# EAGLE board Quad_Cape (EAGLE 9.2.2)
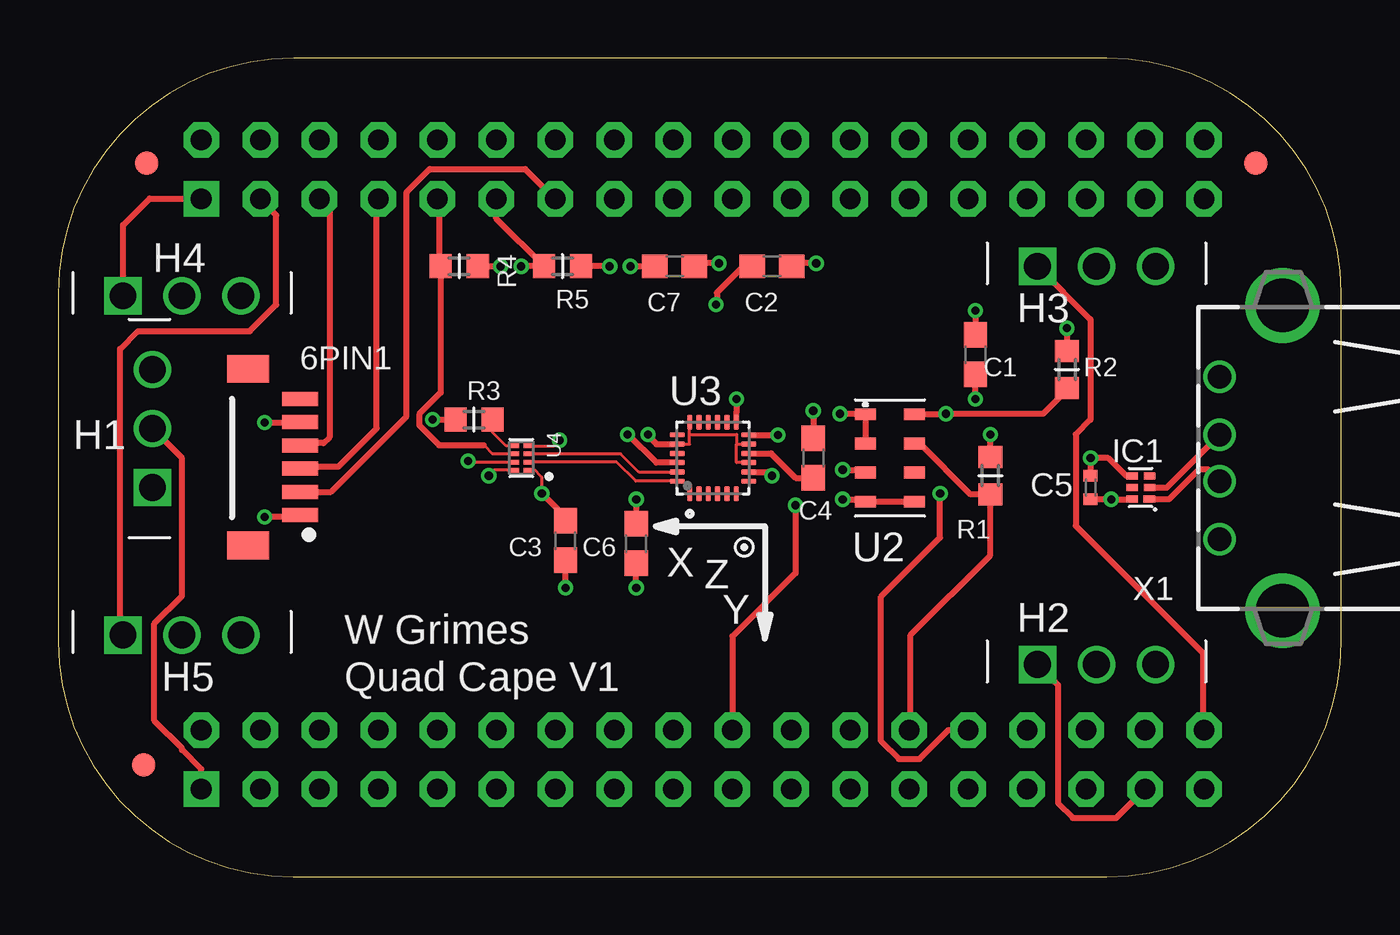
[diagram p0: board, top side]
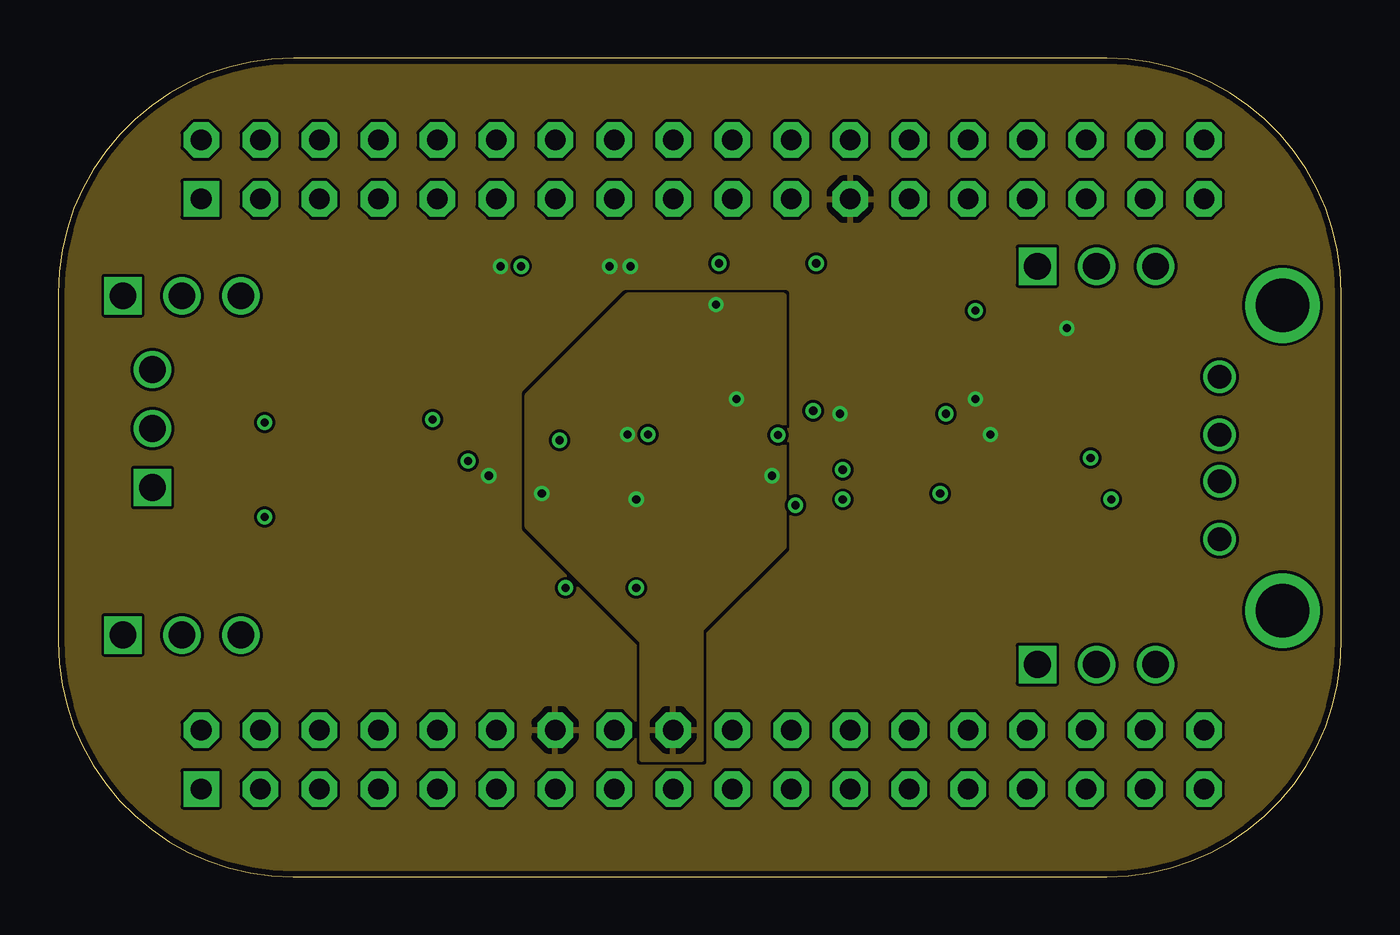
[diagram p1: board, inner layer Route2]
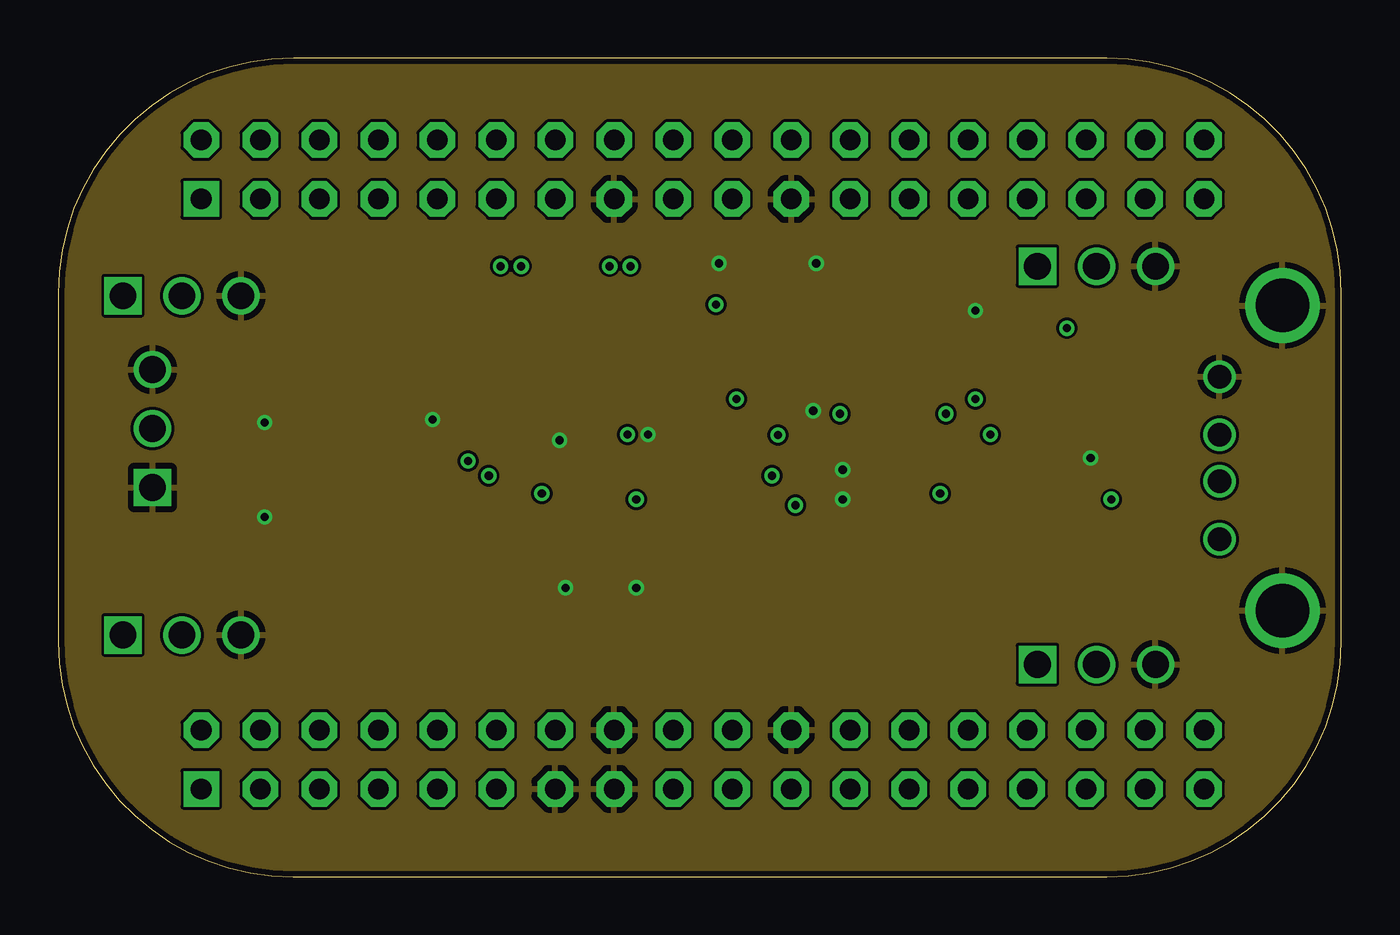
[diagram p2: board, inner layer Route15]
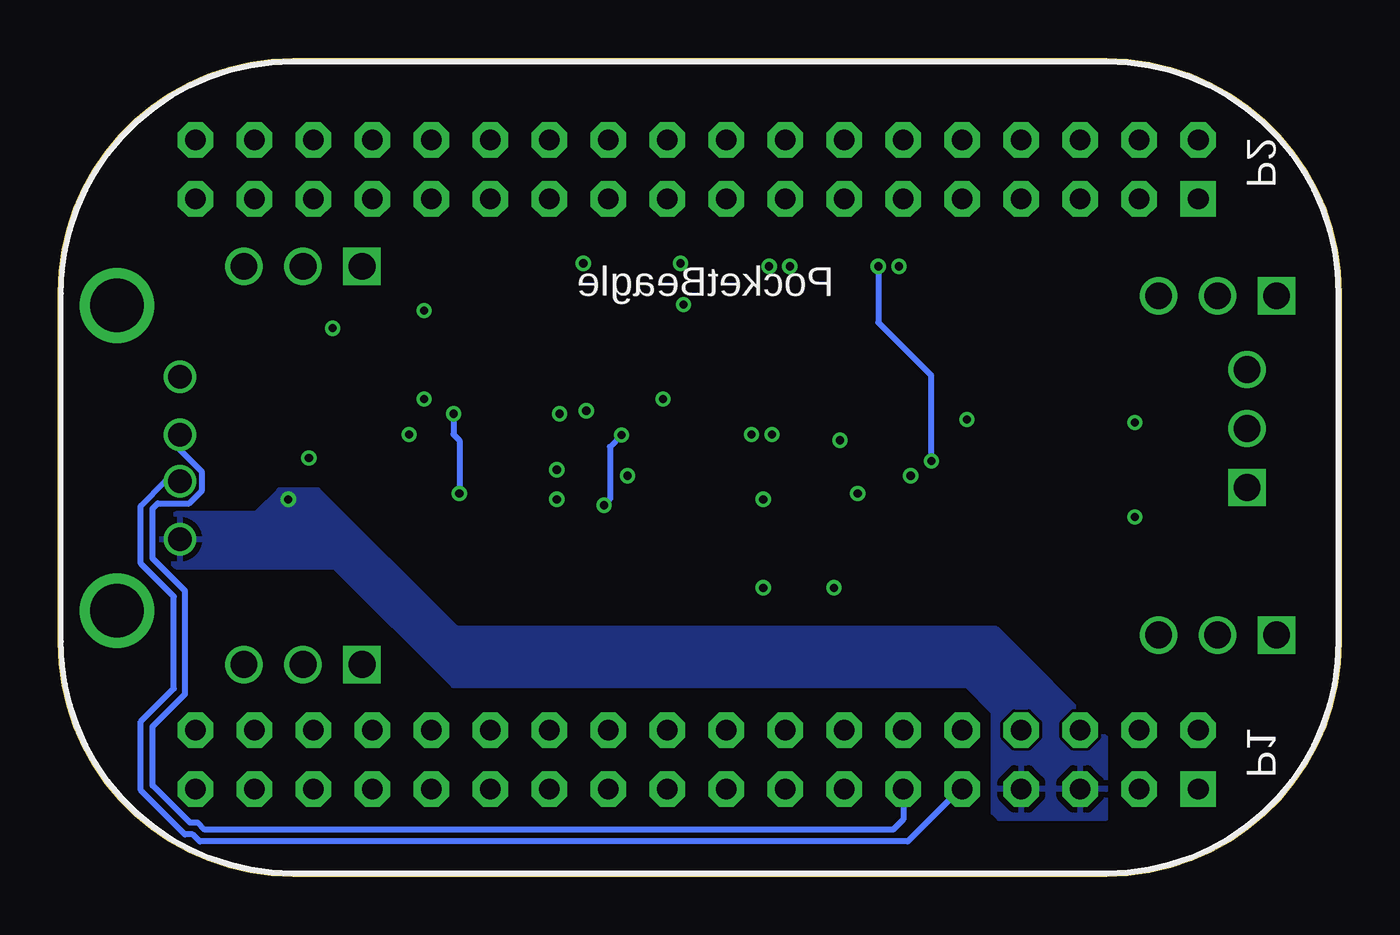
[diagram p3: board, bottom side, seen from below]

Size 55.25 x 35.26 mm. Coordinates in mm from the lower left corner, seen from the top.
Outline: 0,25.12 0,10.12 arc90 10.12,0 45.15,0 arc90 55.25,10.1 55.25,25.15 arc90 45.14,35.25 10.13,35.25 arc90 0,25.12
Copper layers (1*2*15*16): Top 0.035mm / dielectric 0.23mm / Route2 0.035mm / dielectric 0.93mm / Route15 0.035mm / dielectric 0.23mm / Bottom 0.035mm
Design rules "ENGI301_4lyr *": minimum track width 5mil, minimum drill 12mil, track to track 5mil, track to pad 5mil, pad to pad 5mil, via to via 5mil, smd to smd 5mil, copper to edge 10mil, drill to drill 12mil, minimum pad ring 6mil, minimum via ring 6mil, stop-mask expansion 3mil, vias tented up to drill 25mil, thermal gap 10mil

## Footprints (pad centres in the part's own frame; a part is rotated, then mirrored left to right if it is on the bottom)
STRAWSON_EAGLE_LIB_JST_SH_6 = smd 0.6 x 1.55: 1 5,0; 2 4,0; 3 3,0; 4 2,0; 5 1,0; 6 0,0 | smd 1.2 x 1.8: P$1 -1.3,-2.225; P$2 6.3,-2.225
C0603 = smd 1.1 x 1: 1 -0.85,0; 2 0.85,0
0402 = smd 0.5 x 0.6: 1 -0.5,0; 2 0.5,0
FIDUCIAL_40MIL = smd 1.016 x 1.016: P$1 0,0
3PIN_100MIL = drill 1.15 square: 1 -2.54,0 | drill 1.15: 2 0,0; 3 2.54,0
SON-6(TI)-DRY = smd 0.3 x 0.52: 1 -0.5,-0.38 | smd 0.3 x 0.49: 2 0,-0.375; 3 0.5,-0.375; 4 0.5,0.375; 5 0,0.375; 6 -0.5,0.375
R0603 = smd 0.95 x 1.031: 1 -0.8,0; 2 0.8,0
POCKETBEAGLE = drill 0.889 pad 1.524 square: 1 5.91,3.53; 37 5.91,28.93 | drill 0.889 pad 1.524 octagon: 2 5.91,6.07; 3 8.45,3.53; 4 8.45,6.07; 5 10.99,3.53; 6 10.99,6.07; 7 13.53,3.53; 8 13.53,6.07; 9 16.07,3.53; 10 16.07,6.07; 11 18.61,3.53; 12 18.61,6.07; 13 21.15,3.53; 14 21.15,6.07; 15 23.69,3.53; 16 23.69,6.07; 17 26.23,3.53; 18 26.23,6.07; 19 28.77,3.53; 20 28.77,6.07; 21 31.31,3.53; 22 31.31,6.07; 23 33.85,3.53; 24 33.85,6.07; 25 36.39,3.53; 26 36.39,6.07; 27 38.93,3.53; 28 38.93,6.07; 29 41.47,3.53; 30 41.47,6.07; 31 44.01,3.53; 32 44.01,6.07; 33 46.55,3.53; 34 46.55,6.07; 35 49.09,3.53; 36 49.09,6.07; 38 5.91,31.47; 39 8.45,28.93; 40 8.45,31.47; 41 10.99,28.93; 42 10.99,31.47; 43 13.53,28.93; 44 13.53,31.47; 45 16.07,28.93; 46 16.07,31.47; 47 18.61,28.93; 48 18.61,31.47; 49 21.15,28.93; 50 21.15,31.47; 51 23.69,28.93; 52 23.69,31.47; 53 26.23,28.93; 54 26.23,31.47; 55 28.77,28.93; 56 28.77,31.47; 57 31.31,28.93; 58 31.31,31.47; 59 33.85,28.93; 60 33.85,31.47; 61 36.39,28.93; 62 36.39,31.47; 63 38.93,28.93; 64 38.93,31.47; 65 41.47,28.93; 66 41.47,31.47; 67 44.01,28.93; 68 44.01,31.47; 69 46.55,28.93; 70 46.55,31.47; 71 49.09,28.93; 72 49.09,31.47
MS5611-01BA03 = smd 0.9 x 0.5: P1 -1.05,1.875; P2 -1.05,0.625; P3 -1.05,-0.625; P4 -1.05,-1.875; P5 1.05,-1.875; P6 1.05,-0.625; P7 1.05,0.625; P8 1.05,1.875
QFN40P300X300X105-25N = smd 0.64 x 0.22: 1 -1.545,1; 2 -1.545,0.6; 3 -1.545,0.2; 4 -1.545,-0.2; 5 -1.545,-0.6; 6 -1.545,-1; 13 1.545,-1; 14 1.545,-0.6; 15 1.545,-0.2; 16 1.545,0.2; 17 1.545,0.6; 18 1.545,1 | smd 0.22 x 0.64: 7 -1,-1.545; 8 -0.6,-1.545; 9 -0.2,-1.545; 10 0.2,-1.545; 11 0.6,-1.545; 12 1,-1.545; 19 1,1.545; 20 0.6,1.545; 21 0.2,1.545; 22 -0.2,1.545; 23 -0.6,1.545; 24 -1,1.545
VOLTAGETRANSLATOR_TXS0102DQER = smd 0.53 x 0.2: 1 -0.335,0.525; 2 -0.335,0.175; 3 -0.335,-0.175; 4 -0.335,-0.525; 5 0.335,-0.525; 6 0.335,-0.175; 7 0.335,0.175; 8 0.335,0.525
GHI2_USB_HOST_HORIZONTAL_W/CHASSIS_GND = drill 1: 1 -3.5,12.99; 2 -1,12.99; 3 1,12.99; 4 3.5,12.99 | drill 2.3: 5 -6.57,10.28; 6 6.57,10.28

## Placement (x,y rotation side)
6PIN1  STRAWSON_EAGLE_LIB_JST_SH_6  [STRAWSON_EAGLE_LIB_JST_SH_6]  10.41,20.57 270 top
C1  0.1uF  [C0603]  39.5,22.48 90 top
C2  0.1uF  [C0603]  30.73,26.29 180 top
C3  0.1uF  [C0603]  21.84,14.48 90 top
C4  0.1uF  [C0603]  32.51,18.03 270 top
C5  .1uF  [0402]  44.45,16.76 90 top
C6  0.1uF  [C0603]  24.89,14.35 90 top
C7  0.1uF  [C0603]  26.54,26.29 180 top
FUD1  FIDUCIAL  [FIDUCIAL_40MIL]  3.68,4.83 0 top
FUD2  FIDUCIAL  [FIDUCIAL_40MIL]  3.81,30.73 0 top
FUD3  FIDUCIAL  [FIDUCIAL_40MIL]  51.56,30.73 0 top
H1  3PIN_100MIL  [3PIN_100MIL]  4.06,19.3 90 top
H2  3PIN_100MIL  [3PIN_100MIL]  44.7,9.14 0 top
H3  3PIN_100MIL  [3PIN_100MIL]  44.7,26.29 0 top
H4  3PIN_100MIL  [3PIN_100MIL]  5.33,25.02 0 top
H5  3PIN_100MIL  [3PIN_100MIL]  5.33,10.41 0 top
IC1  TPD4S012DRY  [SON-6(TI)-DRY]  46.61,16.76 90 top
R1  10K  [R0603]  40.13,17.27 90 top
R2  10K  [R0603]  43.43,21.84 90 top
R3  10K  [R0603]  17.91,19.69 180 top
R4  10K  [R0603]  17.27,26.29 0 top
R5  10K  [R0603]  21.72,26.29 0 top
U1  POCKETBEAGLE  [POCKETBEAGLE]  0.25,0.25 0 top
U2  MS5611-01BA03  [MS5611-01BA03]  35.81,18.03 0 top
U3  ICM-20948  [QFN40P300X300X105-25N]  28.19,18.03 90 top
U4  TXS0102DQER  [VOLTAGETRANSLATOR_TXS0102DQER]  19.94,18.03 180 top
U$5  [XYZ_BIG]  30.43,15.09 180 top
X1  USB  [GHI2_USB_HOST_HORIZONTAL_W/CHASSIS_GND]  62.99,18.03 90 top

## Library data of the parts
6PIN1 C1-C4 C6 C7 FUD1-FUD3 H1-H5 R1-R5 U1 U2 X1 = Quad_Cape
C5 = GHI-BasicComponents
IC1 = GHI-IC
U3 = Quad_Cape; AVAILABILITY: Unavailable; DESCRIPTION: 9 Axis=3 Axis Gyro+3 Axis Accel+Compass. Pin For Pin With m; MF: TDK InvenSense; MP: ICM-20948; PACKAGE: QFN-24 InvenSense; PRICE: None
U4 = Quad_Cape; AVAILABILITY: Unavailable; DESCRIPTION: 2-Bit Bidirectional Voltage-Level Shifter for Open-Drain and Push-Pull Application 8-X2SON -40 to 85; MF: Texas Instruments; MP: TXS0102DQER; PACKAGE: XFDFN-8 Texas Instruments; PRICE: None
U$5 = Strawson_Eagle_Lib

## Nets
ALT_SCL: R2.1 U1.28 U2.P8
ALT_SDA: R1.1 U1.26 U2.P7
BAT.VIN: U1.50
GND: 6PIN1.1 6PIN1.5 C1.2 C2.1 C3.1 C4.1 C5.2 C6.1 C7.1 H1.1 H1.3 H2.3 H3.3 H4.3 H5.3 IC1.4 R3.2 U1.13 U1.15 U1.16 U1.22 U1.51 U1.57 U2.P3 U2.P4 U2.P5 U3.9 U3.11 U3.18 U3.20 U4.4 X1.4 X1.5 X1.6
GPS_RX: 6PIN1.4 U1.41
GPS_TX: 6PIN1.3 U1.43
IMU_INT: U1.20 U3.12
IMU_SCL: R4.1 U1.45 U4.6
IMU_SDA: R5.1 U1.47 U4.7
MOTOR1: H2.1 U1.33
MOTOR2: H3.1 U1.36
MOTOR3: H4.1 U1.37
MOTOR4: H5.1 U1.39
N$1: C4.2 U3.10
N$2: R3.1 U4.5
N$5: U3.23 U4.3
N$6: U3.24 U4.2
USB_DC: C5.1 IC1.6 U1.5 U1.7 X1.1
USBC.D+: IC1.2 U1.11 X1.3
USBC.D-: IC1.1 U1.9 X1.2
VDD_1P8V: C2.2 C3.2 C6.2 U1.18 U3.8 U3.13 U3.22 U4.1
VDD_3P3V: C1.1 C7.2 R1.2 R2.2 R4.2 R5.2 U1.14 U1.59 U2.P1 U2.P2 U4.8
VDD_5V: 6PIN1.2 U1.49
VIN_5V: H1.2 U1.1
VOUT: U1.24

## Tracks (layer width: path | path; a pad name or v marks a point on that pad's centre or on a via)
ALT_SCL  (via drill 0.35)
  Top 0.254: R2.1 43.43,20.96 42.42,19.94 v38.23,19.94 38.2,19.91 U2.P8 | U1.28 38.33,6.32 37.08,5.08 36.2,5.08 35.43,5.84 35.43,12.06 37.97,14.61 v37.97,16.51
  Bottom 0.254: v38.23,19.94 38.23,19.05 37.97,18.8 v37.97,16.51
ALT_SDA
  Top 0.254: U2.P7 37.09,18.66 39.28,16.47 R1.1 40.13,13.84 36.7,10.41 36.7,6.38 U1.26
GND  (via drill 0.35)
  Top 0.127: U3.20 27.19,18.63 27.19,19.05 | 27.19,19.05 U3.18 | 27.19,19.05 29.21,19.05 29.21,18.64 | U3.9 29.21,17.83 29.21,18.64 | U4.4 21.35,18.56 v21.59,18.8 | 29.21,18.64 U3.11
  Top 0.254: 10.41,15.62 6PIN1.1 | 6PIN1.5 10.41,19.56 v8.89,19.56 | 32.51,18.63 C4.1 32.68,18.88 32.51,19.05 v32.51,20.07 | C2.1 31.58,26.42 v32.64,26.42 | U2.P5 U2.P4 34.67,16.26 v33.78,16.26 | 34.8,17.38 U2.P3 34.65,17.53 v33.78,17.53 | U3.20 25.76,18.63 25.4,18.99 v25.4,19.05 | 6PIN1.1 10.33,15.49 v8.89,15.49 | 6PIN1.1 10.35,15.51 | C5.2 v44.45,18.03 45.21,18.03 45.98,17.26 IC1.4 | v21.84,12.45 C3.1 | v24.89,12.45 C6.1 | v28.45,26.42 27.52,26.42 C7.1 | U3.11 | v16.13,19.69 R3.2 | v39.5,24.38 C1.2
  pour Route15: -3.56,38.35 -3.56,-2.29 57.4,-2.29 57.4,38.35
GPS_RX
  Top 0.254: 6PIN1.4 10.41,18.67 11.43,18.67 11.68,18.92 11.68,28.7 11.24,29.14 U1.41
GPS_TX
  Top 0.254: 6PIN1.3 10.41,17.65 12.06,17.65 13.72,19.3 13.72,29.12 U1.43
IMU_INT  (via drill 0.35)
  Top 0.254: U1.20 29.02,10.36 31.75,13.08 v31.75,16 | U3.12 v30.98,19.03 v30.99,19.03
  Bottom 0.254: v30.99,19.03 31.5,18.52 31.5,16.26 v31.75,16
IMU_SCL
  Top 0.127: U4.6 18.71,18.21 18.33,18.59
  Top 0.254: U1.45 16.4,29.11 16.4,26.29 R4.1 16.47,20.85 15.55,19.93 15.55,19.44 16.4,18.59 18.33,18.59
IMU_SDA  (via drill 0.35)
  Top 0.127: v17.65,17.91 17.78,17.91 17.83,17.86 U4.7
  Top 0.254: U1.47 18.86,28.34 R5.1 v19.94,26.29
  Bottom 0.254: v17.65,17.91 17.65,21.59 19.94,23.88 v19.94,26.29
MOTOR1
  Top 0.254: U1.33 45.56,2.54 43.69,2.54 43.05,3.17 43.05,8.25 H2.1
MOTOR2
  Top 0.254: H3.1 44.45,24 44.45,19.69 43.81,19.05 43.81,15.11 49.28,9.65 49.28,6.39 U1.36
MOTOR3
  Top 0.254: H4.1 2.79,28.07 3.94,29.21 6.14,29.21 U1.37
MOTOR4
  Top 0.254: U1.39 9.4,28.49 9.4,24.64 8.25,23.5 3.43,23.5 2.67,22.73 2.67,10.54 H5.1
N$1
  Top 0.254: U3.10 30.7,18.23 31.75,17.18 C4.2
N$2
  Top 0.127: U4.5 19.29,18.56 18.71,19.14 R3.1
N$5
  Top 0.127: U3.23 25,17.43 24.22,18.21 U4.3
N$6
  Top 0.127: U4.2 24.05,17.86 24.87,17.03 U3.24
USB_DC  (via drill 0.35)
  Top 0.254: IC1.6 v45.34,16.26 C5.1
  pour Bottom: 10.16,2.54 10.16,5.97 14.86,10.67 38.1,10.67 44.07,16.64 45.72,16.64 46.74,15.62 50.16,15.62 50.8,14.99 50.8,14.01 50.16,13.37 43.34,13.37 38.23,8.25 16.13,8.25 14.99,7.11 14.99,2.79 14.73,2.54
USBC.D+
  Top 0.254: IC1.2 47.73,16.76 X1.3
  Bottom 0.254: U1.11 18.86,2.47 19.3,2.03 48.94,2.03 49.24,2.34 49.58,2.34 51.18,3.94 51.18,6.48 49.78,7.87 49.78,12.32 51.18,13.72 51.18,15.86 50.96,16.08 49.61,16.08 49.05,16.64 49.05,17.43 50,18.38 X1.3
USBC.D-
  Top 0.254: X1.2 49.49,17.54 49.11,17.54 47.84,16.26 IC1.1
  Bottom 0.254: U1.9 16.41,3.78 18.67,1.52 49.15,1.52 49.46,1.83 49.79,1.83 51.69,3.73 51.69,6.69 50.27,8.11 50.27,12.07 51.69,13.49 51.69,15.97 50.63,17.03 X1.2
VDD_1P8V  (via drill 0.35)
  Top 0.127: U4.1 20.53,17.51 20.78,17.26 20.83,17.21 v20.83,16.51
  Top 0.254: C2.2 29.5,26.29 28.36,25.15 28.36,24.68 v28.32,24.64 | U3.22 25.76,17.83 24.54,19.05 v24.51,19.05 | U3.13 29.19,20.01 29.21,20.03 v29.21,20.57 | v24.89,16.26 C6.2 | C3.2 21.84,15.49 v20.83,16.51 | U3.8 30.57,17.43 v30.73,17.27
  pour Route2: 20.19,20.7 20.19,15.11 25.15,10.16 25.15,5.08 27.69,5.08 27.69,10.67 31.24,14.22 31.24,25.02 24.51,25.02
VDD_3P3V  (via drill 0.35)
  Top 0.127: 19.35,17.51 U4.8 18.78,17.51 v18.54,17.27
  Top 0.254: 43.43,22.61 R2.2 v43.43,23.62 | U2.P2 U2.P1 34.73,19.94 v33.66,19.94 | v24.64,26.29 C7.2 | v23.75,26.29 R5.2 | v39.5,20.57 C1.1 | R1.2 v40.13,19.05 | R4.2 v19.05,26.29
  Bottom 0.254: v19.05,26.29 v19.06,26.29
  pour Route2 (rank 6): -1.02,37.08 -1.02,-1.02 56.13,-1.02 56.13,37.08
VDD_5V
  Top 0.254: 6PIN1.2 11.75,16.57 15,19.83 15,29.48 16,30.48 20.11,30.48 U1.49
VIN_5V
  Top 0.254: H1.2 5.33,18.03 5.33,12.09 4.15,10.9 4.15,6.72 5.33,5.54 5.33,5.46 6.16,4.63 U1.1

## Text on the board
tPlace: W Grimes | Quad Cape V1